# EAGLE board Push Button KRSBI 2020 (EAGLE 9.6.2)
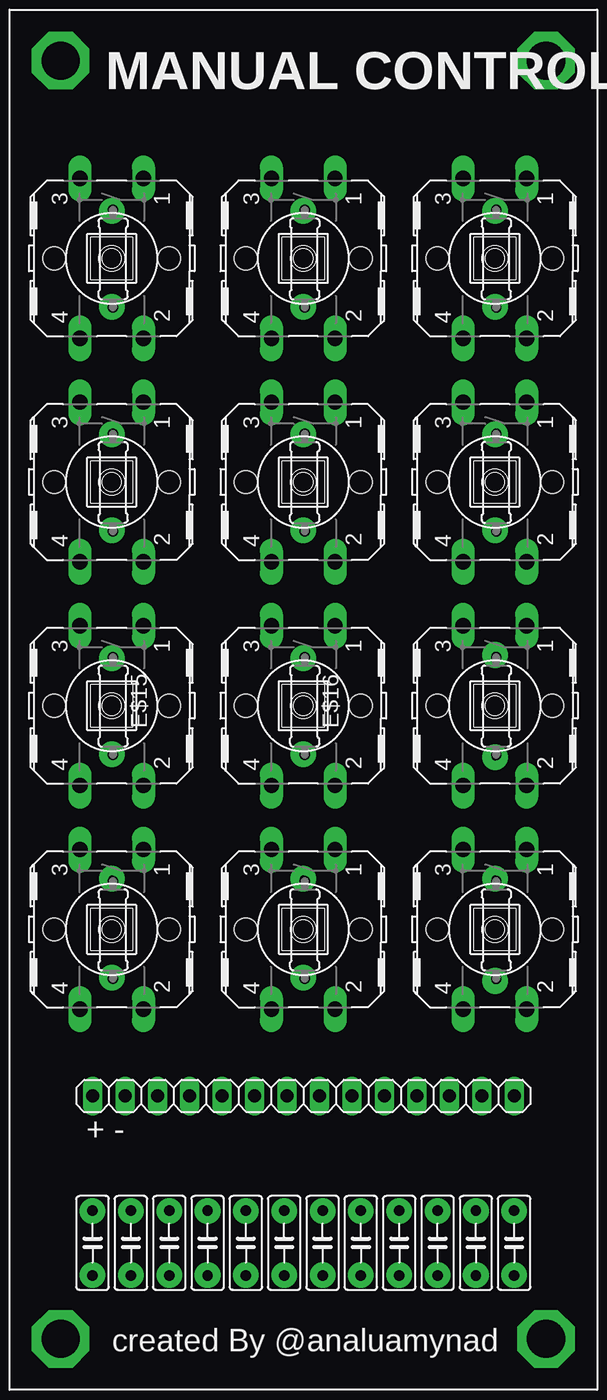
[diagram p0: board, top side]
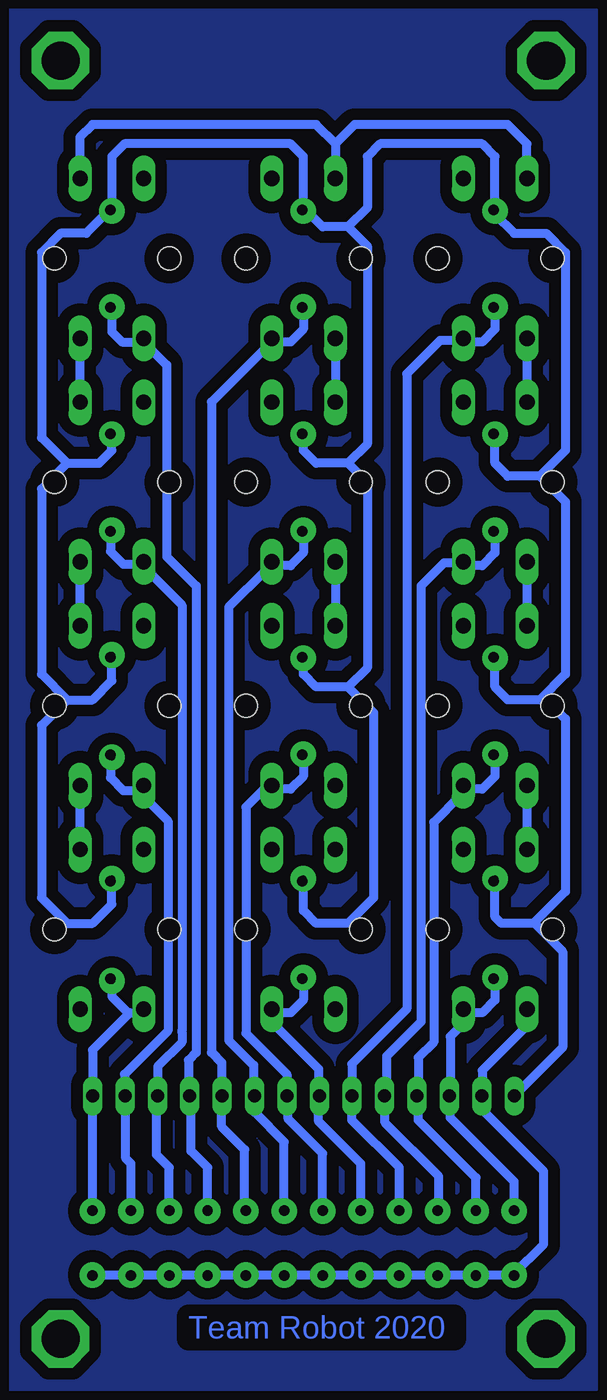
[diagram p1: board, bottom side, seen from below]

No outline drawn. Coordinates in mm, seen from the top.
Copper layers (1*16): Top 0.035mm / dielectric 1.5mm / Bottom 0.035mm
Design rules "default *": minimum track width 6mil, minimum drill 0.35mm, track to track 36mil, track to pad 36mil, pad to pad 36mil, via to via 36mil, smd to smd 6mil, copper to edge 40mil, drill to drill 6mil, minimum pad ring 10mil, minimum via ring 8mil, stop-mask expansion 4mil, vias tented up to drill 0mil, thermal gap 10mil

## Footprints (pad centres in the part's own frame; a part is rotated, then mirrored left to right if it is on the bottom)
B3F-40XX = drill 1.194 long: 1 -6.248,2.489; 2 6.248,2.489; 3 -6.248,-2.489; 4 6.248,-2.489 | hole 1.803: 0,-4.496; 0,4.496
0207/7 = drill 0.813 octagon: 1 -3.81,0; 2 3.81,0
1X14 = drill 1.016 long: 1 -16.51,0; 2 -13.97,0; 3 -11.43,0; 4 -8.89,0; 5 -6.35,0; 6 -3.81,0; 7 -1.27,0; 8 1.27,0; 9 3.81,0; 10 6.35,0; 11 8.89,0; 12 11.43,0; 13 13.97,0; 14 16.51,0
C5B2.5 = drill 0.813 pad 1.6 octagon: 1 -2.54,0; 2 2.54,0

## Placement (x,y rotation side)
E$1  [B3F-40XX]  46.99,68.53 270 top
E$2  [B3F-40XX]  61.99,68.53 270 top
E$3  [B3F-40XX]  31.99,51.03 270 top
E$4  [B3F-40XX]  46.99,51.03 270 top
E$5  [B3F-40XX]  61.99,51.03 270 top
E$6  [B3F-40XX]  31.99,33.53 270 top
E$7  [B3F-40XX]  46.99,33.53 270 top
E$8  [B3F-40XX]  61.99,33.53 270 top
E$9  [B3F-40XX]  31.99,16.03 270 top
E$10  [B3F-40XX]  46.99,16.03 270 top
E$11  [B3F-40XX]  61.99,16.03 270 top
E$12  [0207/7]  47.1,16 270 top
E$13  [B3F-40XX]  31.99,68.53 270 top
E$14  [0207/7]  32.1,16 270 top
E$15  [0207/7]  32.1,33.5 270 top
E$16  [0207/7]  47.1,33.5 270 top
E$17  [0207/7]  62.1,33.5 270 top
E$18  [0207/7]  62.1,51 270 top
E$19  [0207/7]  47.1,51 270 top
E$20  [0207/7]  32.1,51 270 top
E$21  [0207/7]  32.1,68.5 270 top
E$22  [0207/7]  47.1,68.5 270 top
E$23  [0207/7]  62.1,68.5 270 top
E$24  [1X14]  47,3 0 top
E$26  [0207/7]  62.1,16 270 top
E$28  [C5B2.5]  30.5,-8.5 90 top
E$29  [C5B2.5]  33.5,-8.5 90 top
E$30  [C5B2.5]  36.5,-8.5 90 top
E$31  [C5B2.5]  39.5,-8.5 90 top
E$32  [C5B2.5]  42.5,-8.5 90 top
E$33  [C5B2.5]  45.5,-8.5 90 top
E$34  [C5B2.5]  48.5,-8.5 90 top
E$35  [C5B2.5]  51.5,-8.5 90 top
E$36  [C5B2.5]  54.5,-8.5 90 top
E$37  [C5B2.5]  57.5,-8.5 90 top
E$38  [C5B2.5]  60.5,-8.5 90 top
E$39  [C5B2.5]  63.5,-8.5 90 top

## Library data of the parts
E$1-E$11 E$13 = switch-omron
E$12 E$14-E$23 E$26 = resistor
E$24 = adafruit
E$28-E$39 = capacitor-wima

## Tracks (layer width: path | path; a pad name or v marks a point on that pad's centre or on a via)
PLG
  pour Bottom: 24,88 70,88 70,-20 24,-20
S$1
  Bottom 0.7: 29.5,76 29.5,77.5 31,79 43,79 44.5,77.5 | 44.5,77.5 44.5,76 | 44.5,77.5 46,79 63.5,79 64.5,78 64.5,76
S$2
  Bottom 0.7: 64.5,61.1 64.5,58.5
S$3
  Bottom 0.7: 64.5,43.5 64.5,41.1
S$4
  Bottom 0.7: 64.5,26.1 64.5,23.6
S$5
  Bottom 0.7: 29.5,61.1 29.5,58.7
S$6
  Bottom 0.7: 29.5,43.6 29.5,41.2
S$7
  Bottom 0.7: 29.5,26 29.5,23.6
S$8
  Bottom 0.7: 44.5,61.1 44.5,58.5
S$9
  Bottom 0.7: 44.5,43.3 44.5,41.1
S$10
  Bottom 0.7: 32,12 32,10.5 33,9.5 34,9.5
S$11
  Bottom 0.7: 32,29.5 32,28 33,27 34,27
S$12
  Bottom 0.7: 32,47 32,45.5 33,44.5 34,44.5
S$13
  Bottom 0.7: 32,64.5 32,63 33,62 34,62
S$14
  Bottom 0.7: 47,64.5 47,63 48,62 49,62
S$15
  Bottom 0.7: 47,47 47,45.5 48,44.5 49,44.5
S$16
  Bottom 0.7: 47,29.5 47,28 48,27 49,27
S$17
  Bottom 0.7: 47,12 47,10.5 48,9.5 49,9.5
S$18  (via drill 0.5 pad 2)
  Bottom 0.7: 62,12.1 v62,12 62,10.8 60.7,9.5 60.6,9.5 | 60.6,9.5 60,9.5 | 60.6,9.5 63.5,6.6 63.5,4.3
S$19
  Bottom 0.7: 62.1,29.6 62.1,27.9 61.1,26.9 59.7,26.9
S$20
  Bottom 0.7: 62.1,47.1 62.1,45.6 61.1,44.6 60,44.6
S$21
  Bottom 0.7: 62,64.6 62,62.8 61.2,62 60,62
S$22
  Bottom 0.7: 62,72.5 64,70.5 66,70.5 67.5,69 67.5,54.5 65.5,52.5 | 65.5,52.5 63,52.5 62,53.5 62,54.5 | 65.5,52.5 67.5,50.5 67.5,36 65.5,34 | 65.5,34 63.5,34 62,35.5 62,37 | 65.5,34 67.5,32 67.5,18.5 65.5,16.5 63.5,16.5 62,18 62,19.5
S$23
  Bottom 0.7: 32,72.5 32,76.5 33,77.5 41,77.5 42,76.5 42,72.5 43.5,71 | 43.5,71 45.5,71 47,72.5 47,76.5 48,77.5 61,77.5 62,76.5 62,73 | 43.5,71 42,69.5 42,54 43.5,52.5 | 43.5,52.5 46,52.5 47,53.5 47,54.5 | 43.5,52.5 42,51 42,36.5 43.5,35 | 43.5,35 46,35 47,36 47,37 | 43.5,35 41.5,33 41.5,18.5 43.5,16.5 46,16.5 47,17.5 47,19.5
S$24
  Bottom 0.7: 32,72 30.5,70.5 28,70.5 26.5,69 26.5,53.5 28.5,51.5 | 28.5,51.5 31,51.5 32,52.5 32,54.5 | 28.5,51.5 26.5,49.5 26.5,36 28.5,34 | 28.5,34 31,34 32,35 32,37 | 28.5,34 28,34 26.5,32.5 26.5,19 29,16.5 31.5,16.5 32,17 32,19.5
S$25
  Bottom 0.7: 28.9,16.5 26.7,14.3 26.7,6.8 30.4,3.1
S$26
  Bottom 0.7: 56.5,8 56.5,7.2 58.4,5.3 58.4,4.2
S$27
  Bottom 0.7: 52.85,8.9 52.85,7.35 50.9,5.4 50.9,4.1
S$28
  Bottom 0.7: 59.4,26.3 57.6,24.5 57.6,8.1 61,4.7 61,4.2
S$29
  Bottom 0.7: 59.2,44.1 56.5,41.4 56.5,8.1
S$30
  Bottom 0.7: 59.1,61.6 57.7,60.2 57.7,45.2 55.4,42.9 55.4,6.4 56,5.8 56,4.2
S$31
  Bottom 0.7: 49.9,61.6 54.2,57.3 54.2,6.4 53.4,5.6 53.4,4.1
S$32
  Bottom 0.7: 49.9,44.2 52.85,41.25 52.85,8.75
S$33
  Bottom 0.7: 49.9,26.9 50.2,26.9 51.5,25.6 51.5,7.9 48.3,4.7 48.3,4
S$34
  Bottom 0.7: 49.4,8.8 49.4,8.7 45.8,5.1 45.8,4.1
S$35
  Bottom 0.7: 29.5,8.8 29.5,8.5 33,5 33,4.1
S$36
  Bottom 0.7: 34.5,8.65 35.5,7.65 35.5,3.9
S$37
  Bottom 0.7: 34.7,26.5 36.8,24.4 36.8,7.2 38,6 38,4.2
S$38
  Bottom 0.7: 34.8,44.7 36,44.7 37.8,42.9 37.8,8.8 40.5,6.1 40.5,4.1
S$39
  Bottom 0.7: 35,62.1 36.3,62.1 38.9,59.5 38.9,9.8 43.2,5.5 43.2,4
S$40  (via drill 0.5 pad 2)
  Bottom 0.7: 63.6,-11 v63.5,-11 v60.5,-11 v57.5,-11 v54.5,-11 v51.5,-11 v48.5,-11 v45.5,-11 v42.5,-11 v39.5,-11 v36.5,-11 v33.5,-11 30.6,-11 28.2,-8.6 28.2,-2.9 33,1.9 33,2.2
S$41
  Bottom 0.7: 30.5,-5.8 30.5,-3.7 35.5,1.3 35.5,2.3
S$42
  Bottom 0.7: 33.5,-5.9 33.5,-3.4 38,1.1 38,2.1
S$43
  Bottom 0.7: 36.4,-5.8 36.4,-3.3 40.6,0.9 40.6,2.2
S$44
  Bottom 0.7: 39.5,-5.7 39.5,-2.6 43.2,1.1 43.2,2.3
S$45
  Bottom 0.7: 42.5,-5.9 42.5,-2.3 45.8,1 45.8,2.3
S$46
  Bottom 0.7: 45.5,-5.8 45.5,-1.5 48.2,1.2 48.2,2.3
S$47
  Bottom 0.7: 48.5,-5.9 48.5,-0.6 50.8,1.7 50.8,2.4
S$48
  Bottom 0.7: 51.6,-5.8 51.6,-1.2 53.4,0.6 53.4,2.4
S$49
  Bottom 0.7: 54.5,-5.7 54.5,-2.6 55.8,-1.3 55.8,2.3 55.9,2.4
S$50
  Bottom 0.7: 57.5,-5.8 57.5,-2.6 58.5,-1.6 58.5,2.1
S$51
  Bottom 0.7: 60.5,-5.7 60.5,-2.3 60.9,-1.9 60.9,2.3
S$52
  Bottom 0.7: 63.5,-5.8 63.5,2.3 63.6,2.4
S$53  (via drill 3 pad 4.5)
  other vias: 28,84
S$54  (via drill 3 pad 4.5)
  other vias: 66,84
S$55  (via drill 3 pad 4.5)
  other vias: 66,-16
S$56  (via drill 3 pad 4.5)
  other vias: 28,-16
S$57  (via drill 0.5 pad 2)
  other vias: 30.5,-6
S$58  (via drill 0.5 pad 2)
  other vias: 33.5,-6
S$59  (via drill 0.5 pad 2)
  other vias: 36.5,-6
S$60  (via drill 0.5 pad 2)
  other vias: 39.5,-6
S$61  (via drill 0.5 pad 2)
  other vias: 42.5,-6
S$62  (via drill 0.5 pad 2)
  other vias: 45.5,-6
S$63  (via drill 0.5 pad 2)
  other vias: 48.5,-6
S$64  (via drill 0.5 pad 2)
  other vias: 51.5,-6
S$65  (via drill 0.5 pad 2)
  other vias: 54.5,-6
S$66  (via drill 0.5 pad 2)
  other vias: 57.5,-6
S$67  (via drill 0.5 pad 2)
  other vias: 60.5,-6
S$68  (via drill 0.5 pad 2)
  other vias: 63.5,-6
S$69  (via drill 0.5 pad 2)
  other vias: 30.5,-11
S$70  (via drill 0.5 pad 2)
  other vias: 32,72.25
S$71  (via drill 0.5 pad 2)
  other vias: 32,64.75
S$72  (via drill 0.5 pad 2)
  other vias: 47,72.25
S$73  (via drill 0.5 pad 2)
  other vias: 47,64.75
S$74  (via drill 0.5 pad 2)
  other vias: 62,72.25
S$75  (via drill 0.5 pad 2)
  other vias: 62,64.75
S$76  (via drill 0.5 pad 2)
  other vias: 62,54.75
S$77  (via drill 0.5 pad 2)
  other vias: 62,47.25
S$78  (via drill 0.5 pad 2)
  other vias: 47,54.75
S$79  (via drill 0.5 pad 2)
  other vias: 47,47.25
S$80  (via drill 0.5 pad 2)
  other vias: 32,47.25
S$81  (via drill 0.5 pad 2)
  other vias: 32,54.75
S$82  (via drill 0.5 pad 2)
  other vias: 32,37.25
S$83  (via drill 0.5 pad 2)
  other vias: 32,29.75
S$84  (via drill 0.5 pad 2)
  other vias: 47,37.25
S$85  (via drill 0.5 pad 2)
  other vias: 47,29.75
S$86  (via drill 0.5 pad 2)
  other vias: 62,37.5
S$87  (via drill 0.5 pad 2)
  other vias: 62,29.5
S$88  (via drill 0.5 pad 2)
  other vias: 32,20
S$89  (via drill 0.5 pad 2)
  other vias: 32,12.25
S$90  (via drill 0.5 pad 2)
  other vias: 47,20
S$91  (via drill 0.5 pad 2)
  other vias: 47,12.25
S$92  (via drill 0.5 pad 2)
  other vias: 62,20

## Text on the board
Bottom: Team Robot 2020
tPlace: MANUAL CONTROL | + - | created By @analuamynad